# Altium PCB 7805.PcbDoc
Units mil, origin at the board's own origin, x right, y up, seen from the top; angles counter-clockwise.
Board outline 1629 x 1312.25 mil, 2 copper layers (Top Layer, Bottom Layer); 8 components, 5 nets, 21 pads, 0 vias.
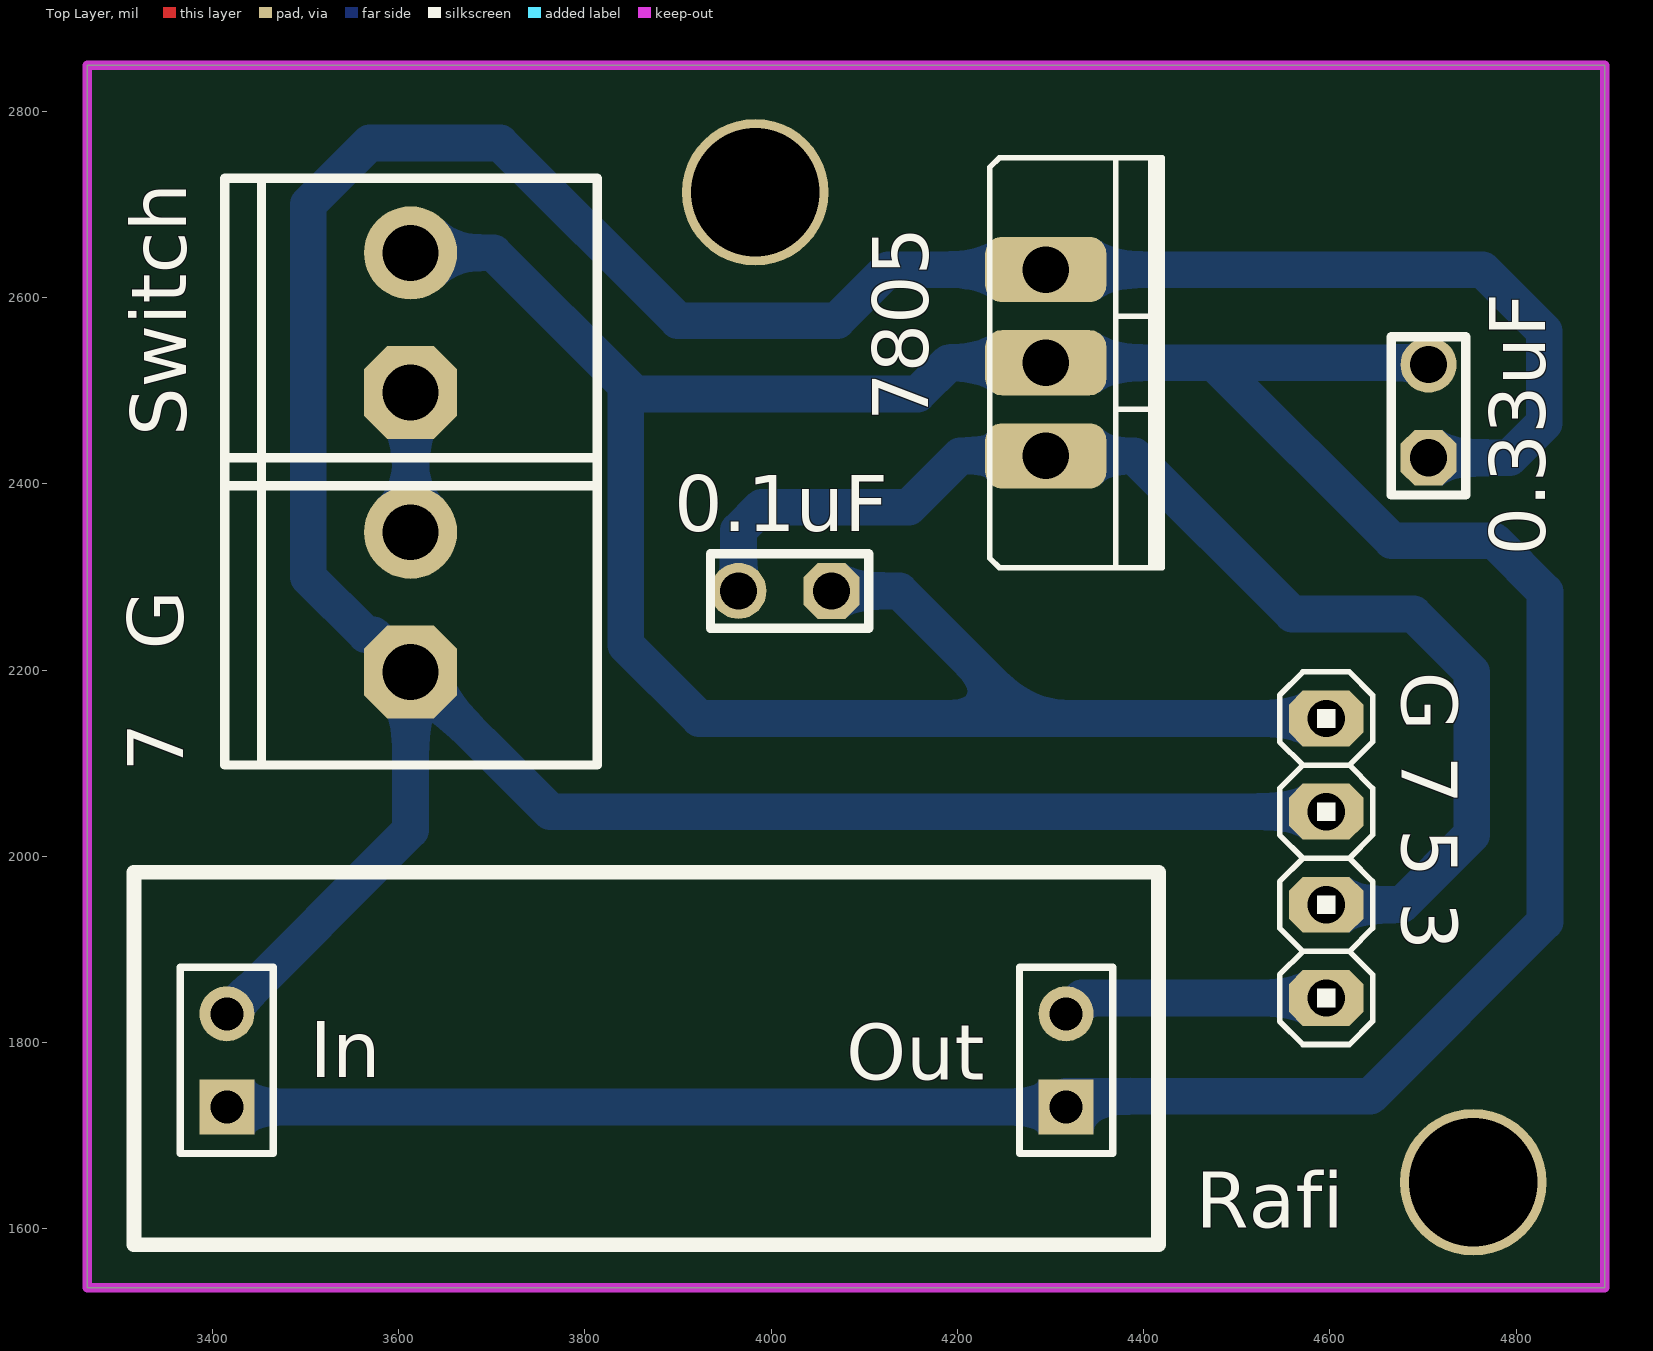
[diagram p0: Top Layer view]
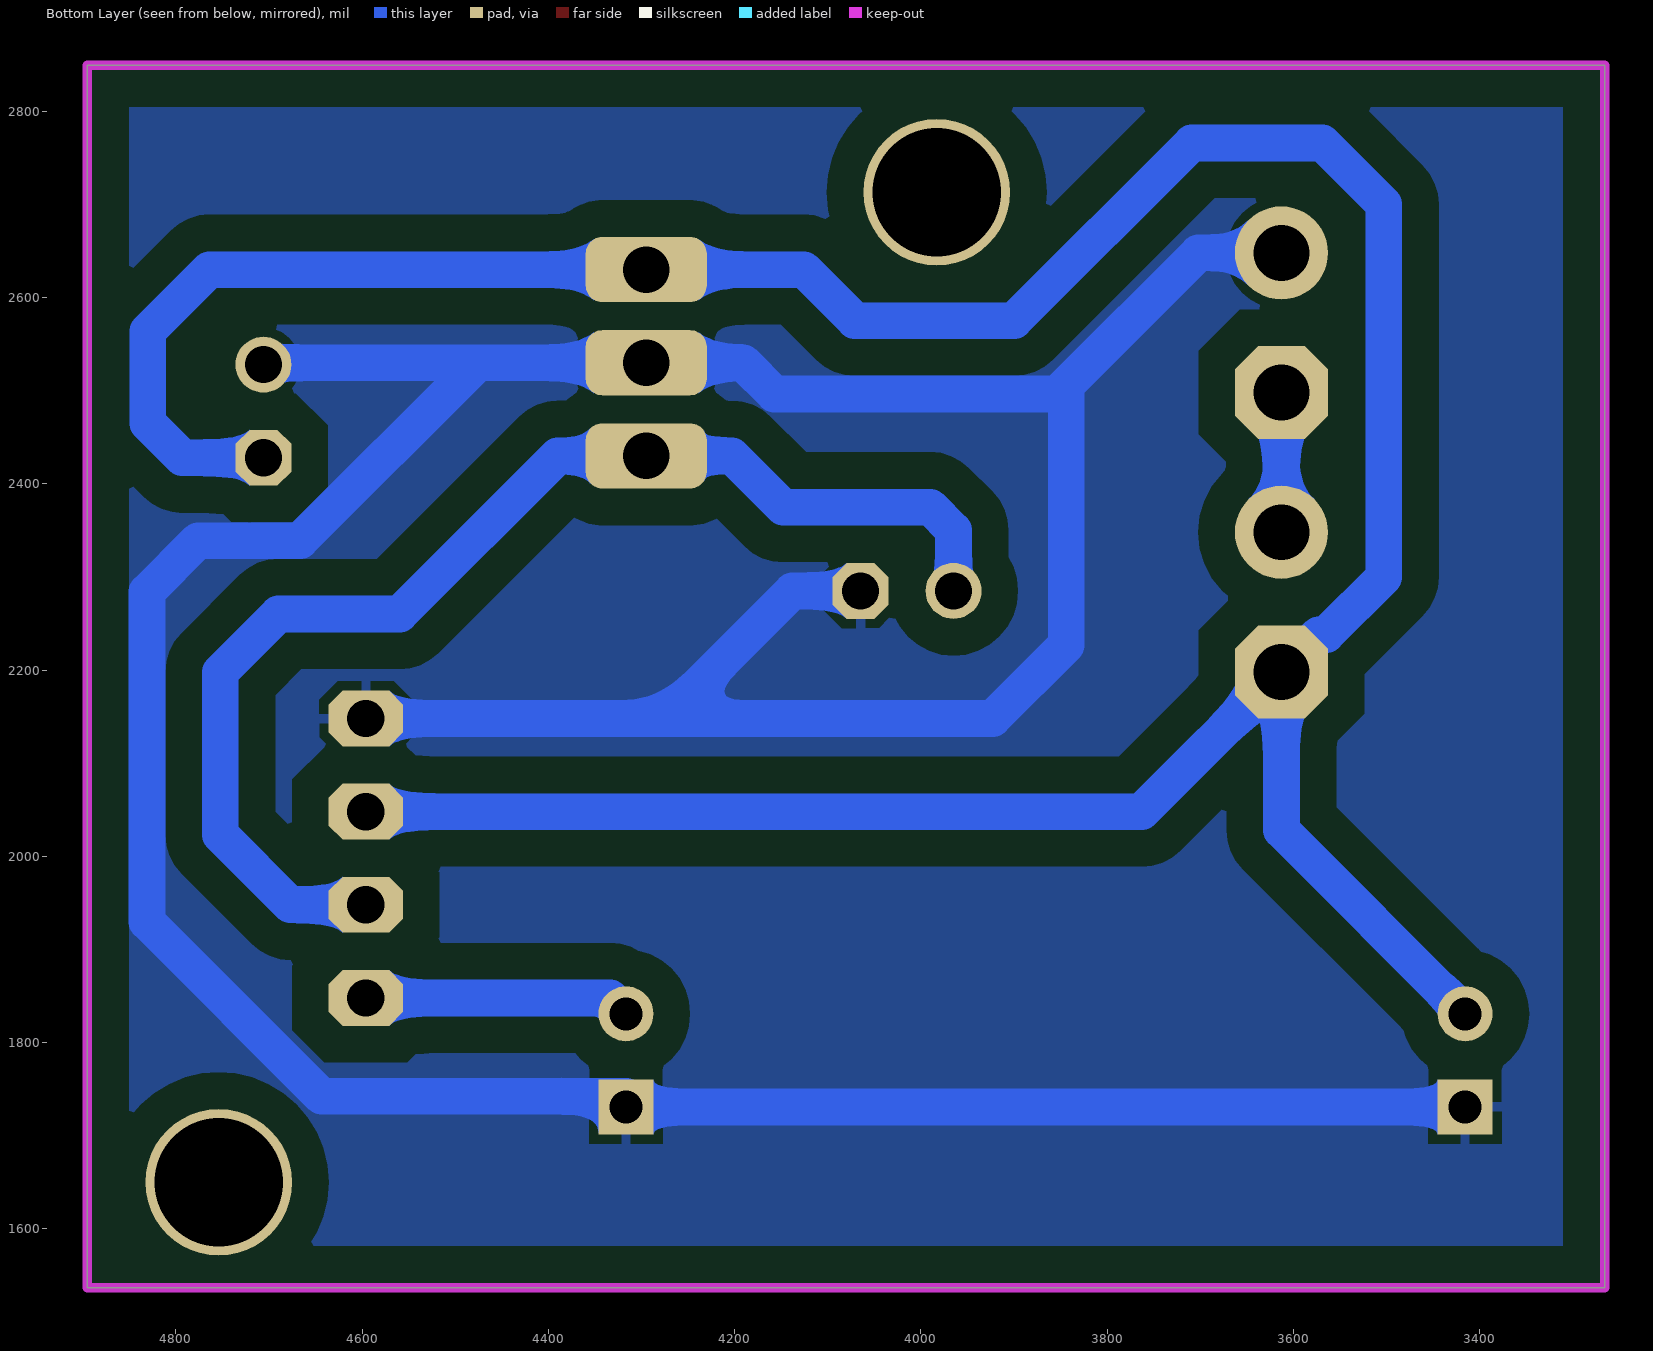
[diagram p1: Bottom Layer view, seen from below]

## Layer stack, top to bottom
Top Solder: solder mask 0.4, Solder Resist, Dk 3.5
Top Layer: signal copper 1.4
Dielectric 1: dielectric 12.6, FR-4, Dk 4.8
Bottom Layer: signal copper 1.4
Bottom Solder: solder mask 0.4, Solder Resist, Dk 3.5

## Board outline
3266,1537 4895,1537 4895,2849.25 3266,2849.25

## Design rules (kind name [scope] priority, off if disabled: settings)
Clearance [All] p1: gap=39.37
PolygonConnect [All] p1: connectstyle=Relief reliefconductorwidth=10 reliefentries=4 polygonreliefangle="90 Angle" airgapwidth=10
RoutingVias [All] p1: holewidth=28 width=50 viastyle="Through Hole" minholewidth=28 minwidth=50 maxholewidth=28 maxwidth=50
SolderMaskExpansion [All] p1: expansion=4
Width [All] p1: maxlimit=39.37 minlimit=39.37 preferedwidth=39.37
30 further rules are at their usual default settings.

## Classes and differential pairs
component class 7805: 0.1uF 0.33uF "7   G" 7805 "G 7 5 3" In Switch

## Components (designator, comment, footprint, x,y, rotation, side; value= is the part's Value field where it differs from the comment)
0.1uF "0.1uF" My_cap100n 4015,2285 r180 top
0.33uF "0.33uF" My_cap100n 4706,2478 r90 top
"7   G" "Power Connector" "My_ Power_Connector" 3413,2048 r90 top (schematic designator Power)
7805 "L7805" to220-123-v 4295,2630 r270 top (schematic designator U?)
"G 7 5 3" "Header 4" My_1X04 4596,1998 r270 top (schematic designator Output)
In "Header 2" HDR1X2 3415.73,1730.95 r90 top
Out "Header 2" HDR1X2 4316.73,1730.95 r90 top
Switch "Power Connector" "My_ Power_Connector" 3413,2348 r90 top

## Footprints (in the part's own frame and the unit in brackets; to place one, negate y for a bottom-side part, rotate by r counter-clockwise, add the part's x,y. Pads: shape width x height; smd on the part's side, far side on the other; paste and mask are expansions set on the pad)
HDR1X2 [mm] "Connector; Header; 2 Position"
  rect 1.5x1.5 hole 0.9: 1(0,0)
  round 1.5 hole 0.9: 2(2.54,0)
  silkscreen extent -1.27,-1.27 3.81,1.27
My_1X04 [mil]
  oct 60x80 hole 40: 1(-150,0) 2(-50,0) 3(50,0) 4(150,0)
  silkscreen extent -200,-50 200,50
"My_ Power_Connector" [mil]
  oct 100x100 hole 60: 1(150,-200)
  round 100 hole 60: 2(300,-200)
  silkscreen extent 50,-400 380,0
My_cap100n [mil]
  oct 60x60 hole 40: 1(-50,0)
  round 60 hole 40: 2(50,0)
  silkscreen extent -90,-40 80,40
to220-123-v [mil] "TO220 123 pin numbering Vertical mount"
  rrect50% 70x130 hole 50: 1(0,0) 2(100,0) 3(200,0)
  silkscreen extent -120,-60 320,125, body extent -121,-59 321,126, height 945

## Part data
0.1uF 0.33uF: library part "Cap ceramic", "CAP-100Nf"
"7   G" Switch: "white Power Connector"
7805: library part L7805-TO220, "LINEAR REGULATOR 5.0V"
"G 7 5 3": "Header, 4-Pin"
In Out: "Header, 2-Pin"

## Free pads (board coordinates)
  round 157.48 hole 137.8: 8(3983,2713) 8(4754,1650)

## Nets (pads, with @x,y where several pads share a name; then routed paths per layer and width w, separated by ;. In a path a pad name is that pad's centre, name@x,y a point inside that pad or via, vN(x,y) a via of type N, cw(c..) or ccw(c..) an arc to the next point about the centre after c; other vN are vias at no path point)
+3.3: "G 7 5 3.4" Out.2 | length 286.3
  Bottom Layer w39.37: Out.2 4333.78,1848 4596,1848
+5: 0.1uF.2 7805.3 "G 7 5 3.3" | length 1343.5
  Bottom Layer w39.37: 0.1uF.2 3965,2350 3990,2375 4148,2375 4203,2430 7805.3 4390,2430 4559.8,2260.2 4689.8,2260.2 4752.2,2197.8 4752.2,2023.2 4677,1948 4596,1948
+7.4: 0.33uF.1 7805.1 "7   G.1" "G 7 5 3.2" In.2 | length 3767.9
  Bottom Layer w39.37: In.2 3613,2028.22 3613,2198 ; 4596,2048 3763,2048 3613,2198 ; 0.33uF.1 4793,2428 4830.06,2465.06 4830.06,2563.89 4763.94,2630 7805.1 4125.8,2630 4071,2575.2 3900,2575.2 3709.2,2766 3569,2766 3503,2700 3503,2300 3565,2238 3573,2238 3613,2198
GND: 0.1uF.1 0.33uF.2 7805.2 "G 7 5 3.1" In.1 Out.1 Switch.2 | length 4814.8
  Bottom Layer w39.37: In.1 Out.1 4316.73,1742.37 4643.37,1742.37 4830.94,1929.94 4830.94,2284.06 4776.06,2338.94 4666.54,2338.94 4476.24,2529.24 ; Switch.2 3702,2648 3844,2506 ; 0.1uF.1 4138,2285 4275,2148 ; 4596,2148 4275,2148 ; 0.33uF.2@4706,2530 7805.2 4190.82,2530 4157.28,2496.46 3853.54,2496.46 3844,2506 ; 3844,2506 3844,2227 3923,2148 4275,2148
NetPower_2: "7   G.2" Switch.1 | length 150
  Bottom Layer w39.37: 3613,2348 Switch.1

## Polygon pours and split planes (outlines as drawn)
GND on Bottom Layer "Bottom Layer-GND" (solid, pour order 3): 3266,2849.25 4895,2849.25 4895,1537 3266,1537 3266,2849.25

## Keep-outs
Keep-Out Layer:
  the board outline again, w10

## Silkscreen, mask and mechanical layers (free items; w line width, h text height)
Top Overlay:
  lines w15.75: 3316.01,1583 3316.01,1983 4416,1983 4416,1583.01 3316.01,1583
  text "Rafi" at 4456,1601 h60